# Altium PCB Relay_PCB.PcbDoc
Units mm, origin at the board's own origin, x right, y up, seen from the top; angles counter-clockwise.
Board outline 323.3 x 125.2 mm, 2 copper layers (Top Layer, Bottom Layer); 156 components, 115 nets, 464 pads, 18 vias.
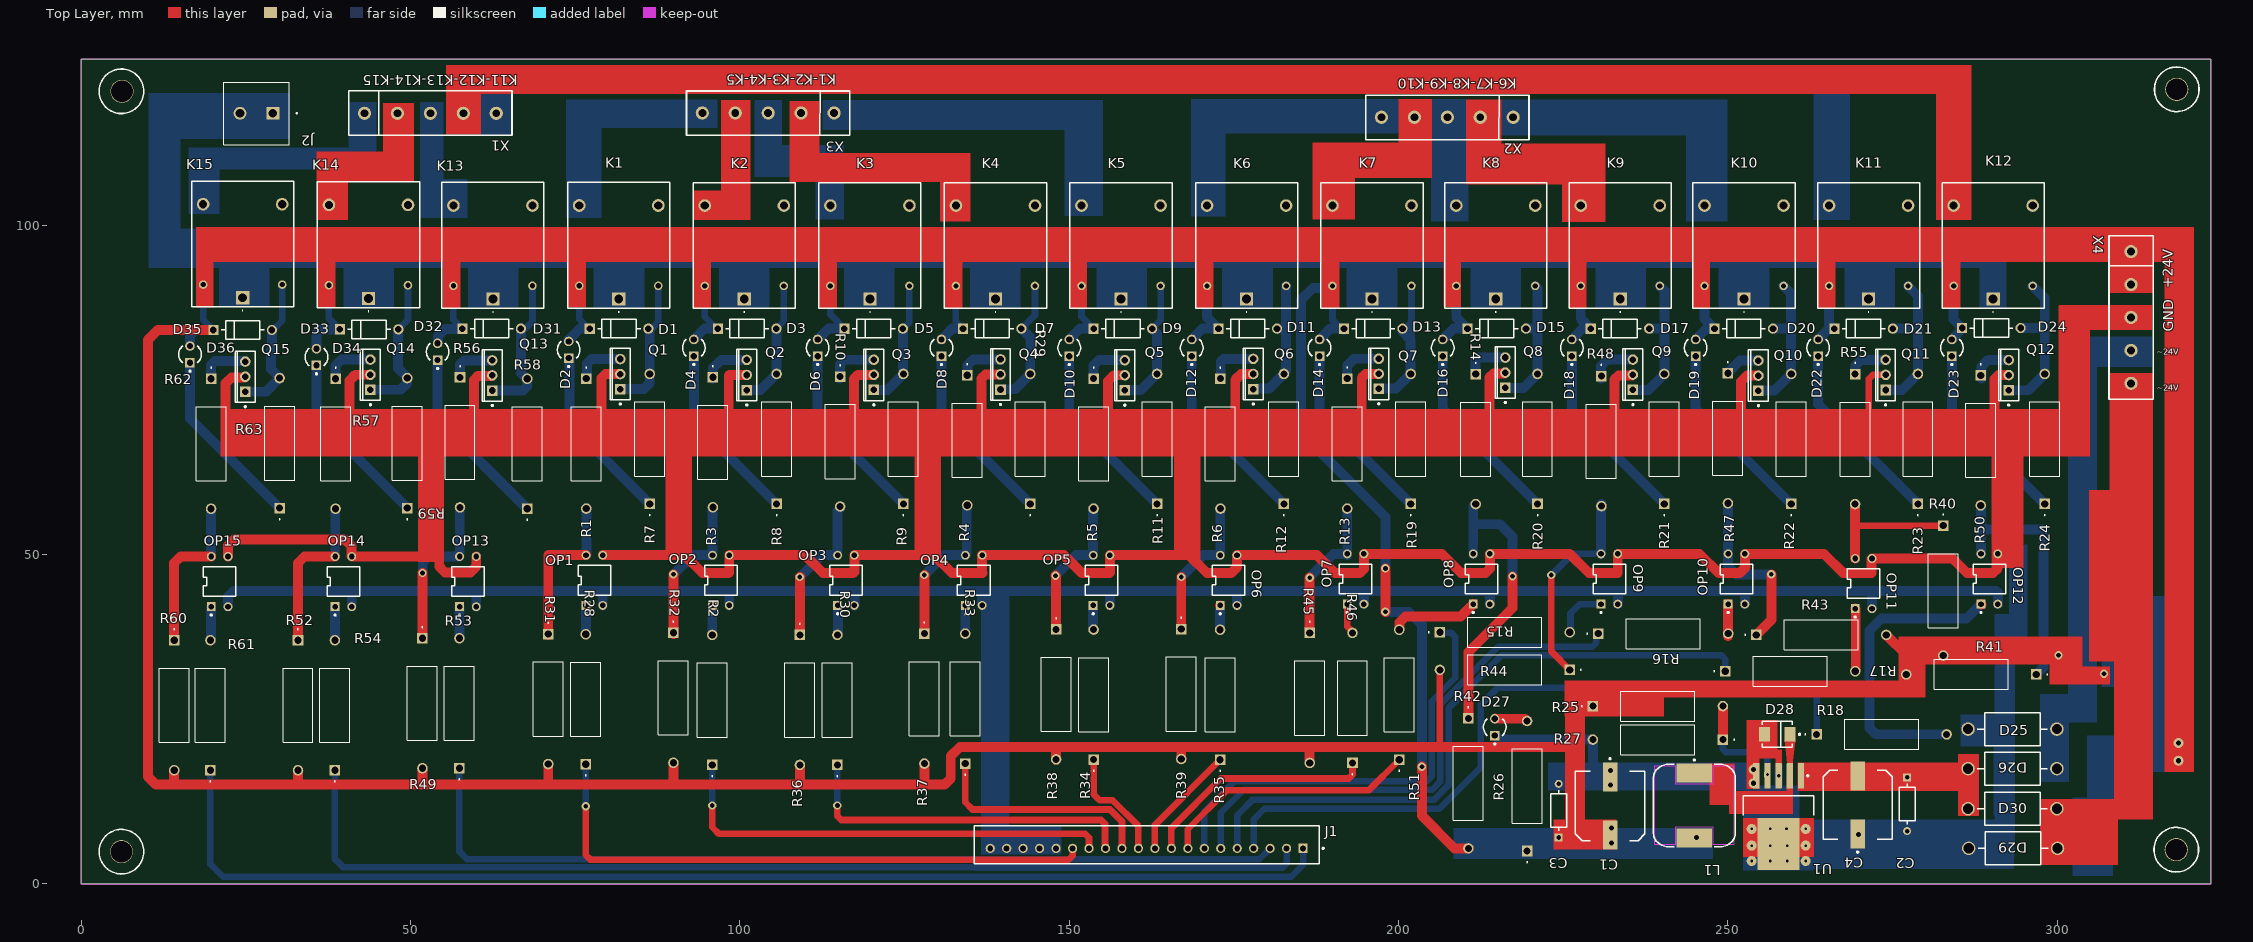
[diagram p0: Top Layer view]
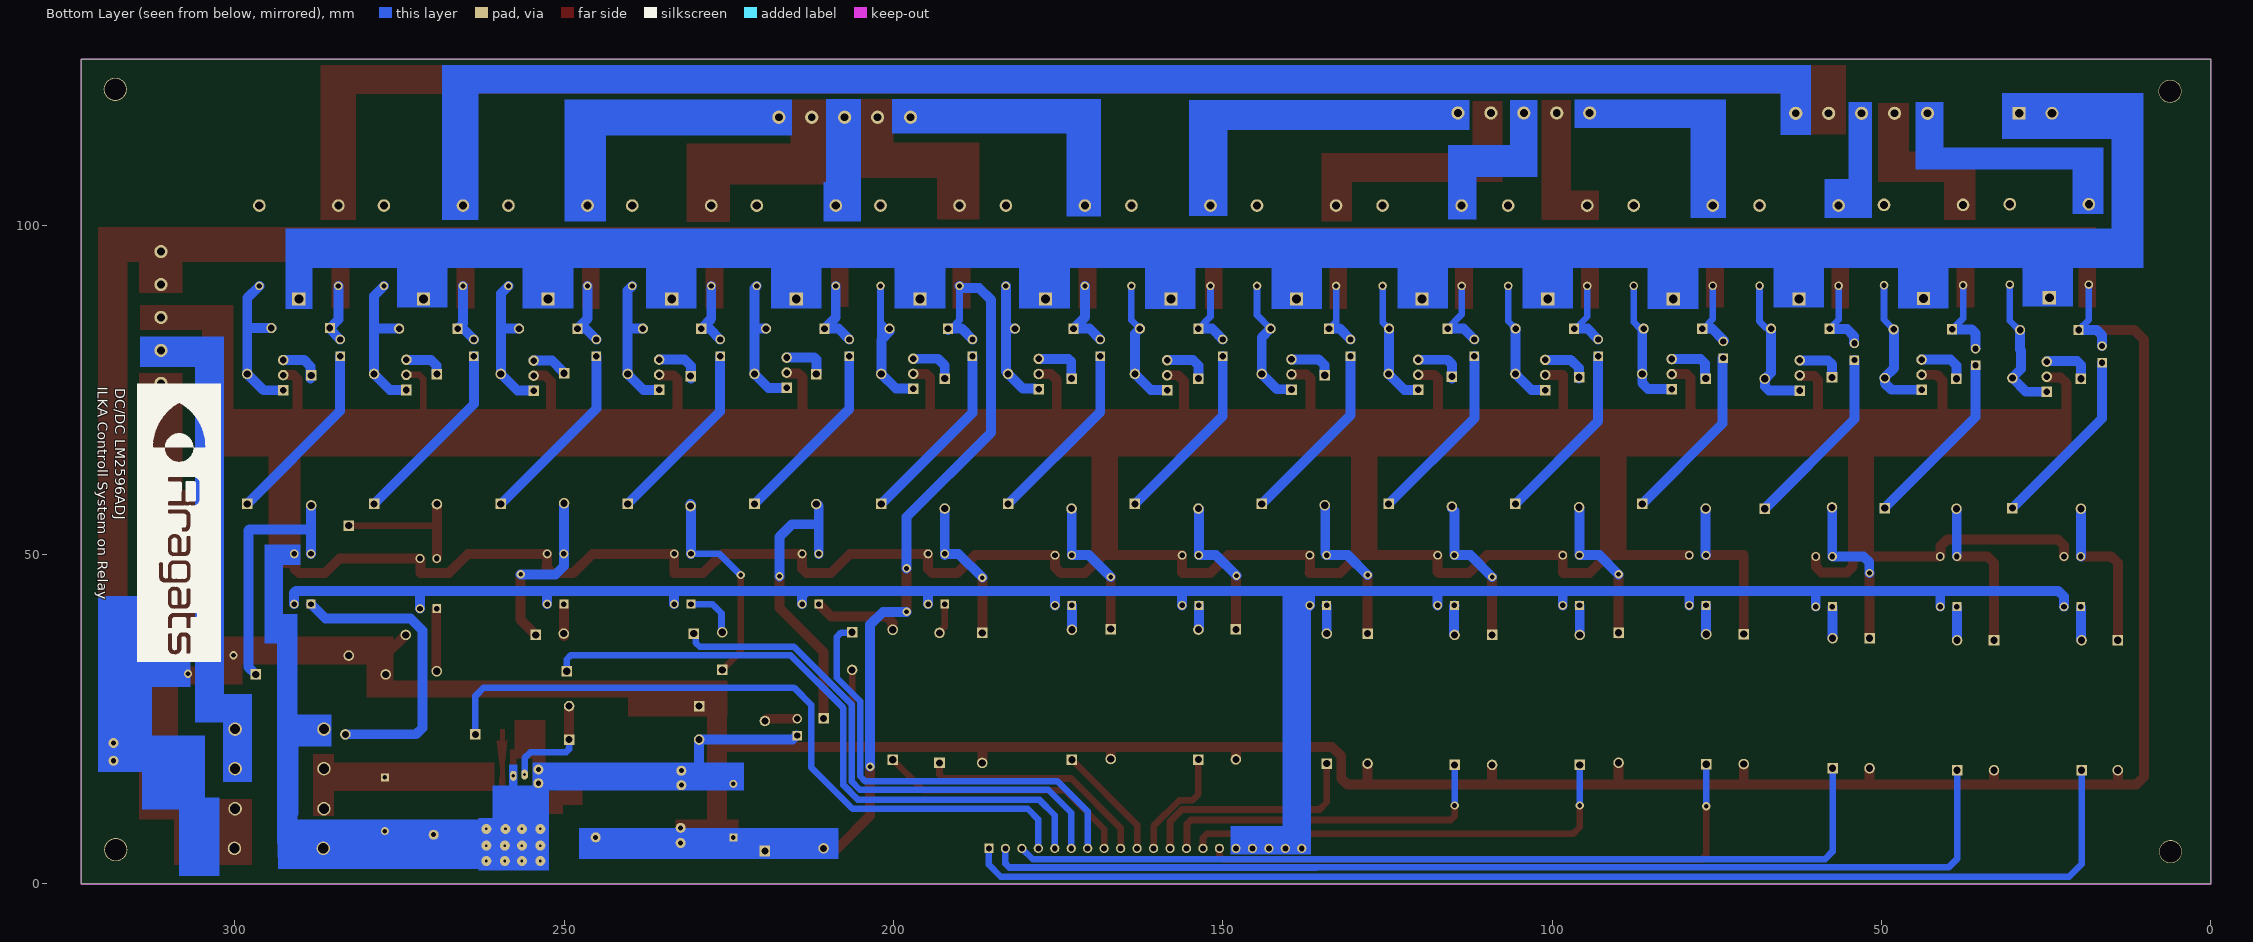
[diagram p1: Bottom Layer view, seen from below]
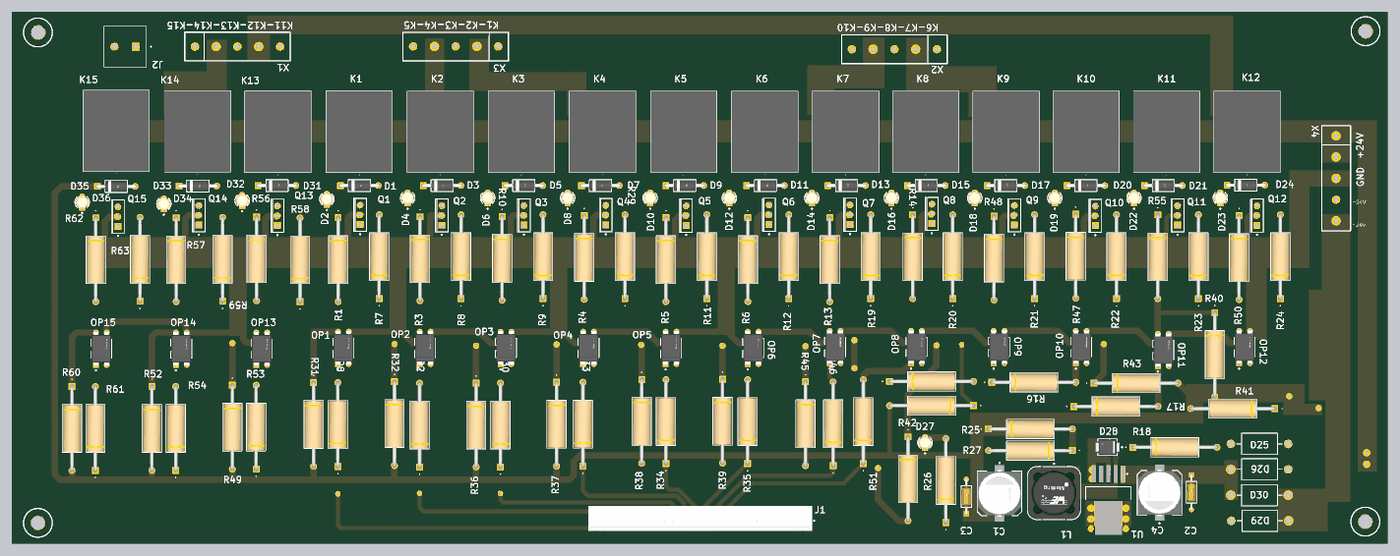
[diagram p2: 3D render of the assembled board from above, using the file's embedded part models]

## Layer stack, top to bottom
Top Solder: solder mask 0.0102, Solder Resist, Dk 3.5
Top Layer: signal copper 0.0356
Dielectric 1: dielectric 0.32, FR-4, Dk 4.8
Bottom Layer: signal copper 0.0356
Bottom Solder: solder mask 0.0102, Solder Resist, Dk 3.5

## Board outline
0,0 0,125.2 323.3,125.2 323.3,0

## Design rules (kind name [scope] priority, off if disabled: settings)
Clearance [All] p1: gap=0.254 ignorepadtopadclearanceinfootprint=FALSE except(0: Arc-Hole Track-Hole SMDPad-Hole THPad-Hole Via-Hole Fill-Hole Poly-Hole Region-Hole Text-Hole)
PolygonConnect [All] p1: connectstyle=Relief reliefconductorwidth=0.254 reliefentries=4 polygonreliefangle="90 Angle" airgapwidth=0.254
RoutingVias [All] p1: holewidth=0.711 width=1.27 viastyle="Through Hole" minholewidth=0.711 minwidth=1.27 maxholewidth=0.711 maxwidth=1.27
SolderMaskExpansion [All] p1: expansion=0.102 istentingtop=FALSE
Width [All] p1: maxlimit=1.5 minlimit=0.254 preferedwidth=1
30 further rules are at their usual default settings.

## Components (designator, comment, footprint, x,y, rotation, side; value= is the part's Value field where it differs from the comment)
C1 "A781MS107M1JLAS030" FP-A781MS-S-MFG 232.1,11.841 r270 top
C2 "C410C104M5U5TA7200" FP-C410C104M5U5TA7200-MFG 277.2,12.1 r270 top
C3 "C410C104M5U5TA7200" FP-C410C104M5U5TA7200-MFG 224.3,11.116 r90 top
C4 "A781MS107M1JLAS030" FP-A781MS-S-MFG 269.7,12 r90 top
D1 "1N4007" FP-1N4007-MFG 81.65,84.3 r0 top value=15pF
D2 "HLMP-1719" FP-HLMP-1719-MFG 74,81.1 r90 top
D3 "1N4007" FP-1N4007-MFG 101.09,84.3 r0 top value=15pF
D4 "HLMP-1719" FP-HLMP-1719-MFG 93,81.4 r90 top
D5 "1N4007" FP-1N4007-MFG 120.3,84.3 r0 top value=15pF
D6 "HLMP-1719" FP-HLMP-1719-MFG 111.8,81.4 r90 top
D7 "1N4007" FP-1N4007-MFG 138.3,84.3 r0 top value=15pF
D8 "HLMP-1719" FP-HLMP-1719-MFG 130.6,81.4 r90 top
D9 "1N4007" FP-1N4007-MFG 158.14,84.3 r0 top value=15pF
D10 "HLMP-1719" FP-HLMP-1719-MFG 150,81.4 r90 top
D11 "1N4007" FP-1N4007-MFG 177.1,84.3 r0 top value=15pF
D12 "HLMP-1719" FP-HLMP-1719-MFG 168.6,81.4 r90 top
D13 "1N4007" FP-1N4007-MFG 196.15,84.3 r0 top value=15pF
D14 "HLMP-1719" FP-HLMP-1719-MFG 188,81.4 r90 top
D15 "1N4007" FP-1N4007-MFG 214.9,84.3 r0 top value=15pF
D16 "HLMP-1719" FP-HLMP-1719-MFG 206.7,81.4 r90 top
D17 "1N4007" FP-1N4007-MFG 233.6,84.3 r0 top value=15pF
D18 "HLMP-1719" FP-HLMP-1719-MFG 226.3,81.4 r90 top
D19 "1N4007" FP-1N4007-MFG 252.4,84.3 r0 top value=15pF
D20 "HLMP-1719" FP-HLMP-1719-MFG 245.1,81.4 r90 top
D21 "1N4007" FP-1N4007-MFG 270.6,84.3 r0 top value=15pF
D22 "HLMP-1719" FP-HLMP-1719-MFG 263.7,81.4 r90 top
D23 "1N4007" FP-1N4007-MFG 290,84.4 r0 top value=15pF
D24 "HLMP-1719" FP-HLMP-1719-MFG 284,81.4 r90 top
D25 "1N5408" ONSC-AXIAL_LEAD-2-267-05_V 293.2,23.5 r180 top
D26 "1N5408" ONSC-AXIAL_LEAD-2-267-05_V 293.2,17.5 r180 top
D27 "HLMP-1719" FP-HLMP-1719-MFG 214.6,23.8 r90 top
D28 "SS24-E3/5BT" FP-95401-MFG 257.5,22.716 r180 top
D29 "1N5408" ONSC-AXIAL_LEAD-2-267-05_V 293.3,5.4 r0 top
D30 "1N5408" ONSC-AXIAL_LEAD-2-267-05_V 293.2,11.416 r0 top
D31 "1N4007" FP-1N4007-MFG 62.3,84.3 r0 top value=15pF
D32 "HLMP-1719" FP-HLMP-1719-MFG 54.1,80.8 r90 top
D33 "1N4007" FP-1N4007-MFG 43.7,84.2 r0 top value=15pF
D34 "HLMP-1719" FP-HLMP-1719-MFG 35.7,80 r90 top
D35 "1N4007" FP-1N4007-MFG 24.5,84.1 r0 top value=15pF
D36 "HLMP-1719" FP-HLMP-1719-MFG 16.5,80.4 r90 top
J1 "B20B-XH-A(LF)(SN)" FP-B20B-XH-A_LF_SN-MFG 161.75,5.925 r0 top
J2 "1890963" PHOENIX_1890963 31.6,121.75 r180 top
K1 "SRD-DC24V-SL-A" srd24vdcslc 81.6,88.8 r90 top
K2 "SRD-DC24V-SL-A" srd24vdcslc 100.665,88.786 r90 top
K3 "SRD-DC24V-SL-A" srd24vdcslc 119.73,88.786 r90 top
K4 "SRD-DC24V-SL-A" srd24vdcslc 138.795,88.786 r90 top
K5 "SRD-DC24V-SL-A" srd24vdcslc 157.86,88.786 r90 top
K6 "SRD-DC24V-SL-A" srd24vdcslc 176.925,88.786 r90 top
K7 "SRD-DC24V-SL-A" srd24vdcslc 195.959,88.786 r90 top
K8 "SRD-DC24V-SL-A" srd24vdcslc 214.745,88.786 r90 top
K9 "SRD-DC24V-SL-A" srd24vdcslc 233.658,88.786 r90 top
K10 "SRD-DC24V-SL-A" srd24vdcslc 252.444,88.786 r90 top
K11 "SRD-DC24V-SL-A" srd24vdcslc 271.357,88.786 r90 top
K12 "SRD-DC24V-SL-A" srd24vdcslc 290.27,88.786 r90 top
K13 "SRD-DC24V-SL-A" srd24vdcslc 62.5,88.8 r90 top
K14 "SRD-DC24V-SL-A" srd24vdcslc 43.6,88.9 r90 top
K15 "SRD-DC24V-SL-A" srd24vdcslc 24.5,89 r90 top
L1 "74477020" WE-PD_1280 244.9,11.916 r180 top
OP1 "PS2501-1-A" FP-PS2501-1-A-MFG 77.9,46.1 r90 top
OP2 "PS2501-1-A" FP-PS2501-1-A-MFG 97.1,46.1 r90 top
OP3 "PS2501-1-A" FP-PS2501-1-A-MFG 116.1,46.1 r90 top
OP4 "PS2501-1-A" FP-PS2501-1-A-MFG 135.5,46.1 r90 top
OP5 "PS2501-1-A" FP-PS2501-1-A-MFG 154.9,46.1 r90 top
OP6 "PS2501-1-A" FP-PS2501-1-A-MFG 174.2,46.1 r90 top
OP7 "PS2501-1-A" FP-PS2501-1-A-MFG 193.47,46.3 r90 top
OP8 "PS2501-1-A" FP-PS2501-1-A-MFG 212.6,46.3 r90 top
OP9 "PS2501-1-A" FP-PS2501-1-A-MFG 232,46.3 r90 top
OP10 "PS2501-1-A" FP-PS2501-1-A-MFG 251.3,46.3 r90 top
OP11 "PS2501-1-A" FP-PS2501-1-A-MFG 270.6,45.6 r90 top
OP12 "PS2501-1-A" FP-PS2501-1-A-MFG 289.7,46.3 r90 top
OP13 "PS2501-1-A" FP-PS2501-1-A-MFG 58.7,45.9 r90 top
OP14 "PS2501-1-A" FP-PS2501-1-A-MFG 39.8,45.9 r90 top
OP15 "PS2501-1-A" FP-PS2501-1-A-MFG 21,45.9 r90 top
Q1 "BD140G" ONSC-TO-225-3-77-09 81.84,77.4 r180 top
Q2 "BD140G" ONSC-TO-225-3-77-09 101.04,77.27 r180 top
Q3 "BD140G" ONSC-TO-225-3-77-09 120.33,77.29 r180 top
Q4 "BD140G" ONSC-TO-225-3-77-09 139.56,77.35 r180 top
Q5 "BD140G" ONSC-TO-225-3-77-09 158.44,77.23 r180 top
Q6 "BD140G" ONSC-TO-225-3-77-09 177.94,77.42 r180 top
Q7 "BD140G" ONSC-TO-225-3-77-09 196.98,77.44 r180 top
Q8 "BD140G" ONSC-TO-225-3-77-09 216.21,77.63 r180 top
Q9 "BD140G" ONSC-TO-225-3-77-09 235.58,77.32 r180 top
Q10 "BD140G" ONSC-TO-225-3-77-09 254.63,77.17 r180 top
Q11 "BD140G" ONSC-TO-225-3-77-09 273.94,77.28 r180 top
Q12 "BD140G" ONSC-TO-225-3-77-09 292.63,77.25 r180 top
Q13 "BD140G" ONSC-TO-225-3-77-09 62.4,77.2 r180 top
Q14 "BD140G" ONSC-TO-225-3-77-09 43.9,77.31 r180 top
Q15 "BD140G" ONSC-TO-225-3-77-09 24.9,77.01 r180 top
R1 "1k" RES_AC01_VIS 76.68,76.715 r270 top
R2 "1k" RES_AC01_VIS 95.8,18.064 r90 top
R3 "1k" RES_AC01_VIS 95.9,76.936 r270 top
R4 "1k" RES_AC01_VIS 134.5,77.236 r270 top
R5 "1k" RES_AC01_VIS 153.699,76.715 r270 top
R6 "1k" RES_AC01_VIS 172.954,76.715 r270 top
R7 "1k" RES_AC01_VIS 86.307,57.69 r90 top
R8 "1k" RES_AC01_VIS 105.562,57.69 r90 top
R9 "1k" RES_AC01_VIS 124.817,57.69 r90 top
R10 "1k" RES_AC01_VIS 115.2,77.036 r270 top
R11 "1k" RES_AC01_VIS 163.327,57.69 r90 top
R12 "1k" RES_AC01_VIS 182.581,57.69 r90 top
R13 "1k" RES_AC01_VIS 192.209,76.715 r270 top
R14 "1k" RES_AC01_VIS 211.7,77.4 r270 top
R15 "1k" RES_AC01_VIS 206.264,38.2 r0 top
R16 "1k" RES_AC01_VIS 230.3,38 r0 top
R17 "1k" RES_AC01_VIS 249.6,32.3 r0 top
R18 "1k" RES_AC01_VIS 263.464,22.7 r0 top
R19 "1k" RES_AC01_VIS 201.836,57.69 r90 top
R20 "1k" RES_AC01_VIS 221.091,57.69 r90 top
R21 "1k" RES_AC01_VIS 240.346,57.69 r90 top
R22 "1k" RES_AC01_VIS 259.6,57.69 r90 top
R23 "1k" RES_AC01_VIS 278.855,57.69 r90 top
R24 "1k" RES_AC01_VIS 298.11,57.69 r90 top
R25 "AC01000001001JA100" RES_AC01_VIS 229.5,27 r0 top
R26 "AC01000001001JA100" RES_AC01_VIS 219.5,5 r90 top
R27 "AC01000001001JA100" RES_AC01_VIS 249.236,21.916 r180 top
R28 "1k" RES_AC01_VIS 76.6,18.164 r90 top
R29 "1k" RES_AC01_VIS 144.072,57.69 r90 top
R30 "1k" RES_AC01_VIS 114.8,18.064 r90 top
R31 "100K" RES_AC01_VIS 70.9,37.936 r270 top
R32 "100K" RES_AC01_VIS 89.9,38.136 r270 top
R33 "1k" RES_AC01_VIS 134.2,18.264 r90 top
R34 "1k" RES_AC01_VIS 153.7,18.875 r90 top
R35 "1k" RES_AC01_VIS 172.9,18.864 r90 top
R36 "100K" RES_AC01_VIS 109.1,37.8 r270 top
R37 "100K" RES_AC01_VIS 128,38 r270 top
R38 "100K" RES_AC01_VIS 148,38.636 r270 top
R39 "100K" RES_AC01_VIS 167,38.7 r270 top
R40 "100K" RES_AC01_VIS 282.7,54.4 r270 top
R41 "100K" RES_AC01_VIS 296.8,31.8 r180 top
R42 "100K" RES_AC01_VIS 210.6,25.136 r270 top
R43 "100K" RES_AC01_VIS 254.3,37.8 r0 top
R44 "100K" RES_AC01_VIS 226,32.5 r180 top
R45 "100K" RES_AC01_VIS 186.5,38.1 r270 top
R46 "1k" RES_AC01_VIS 193,18.364 r90 top
R47 "1k" RES_AC01_VIS 250,77.536 r270 top
R48 "1k" RES_AC01_VIS 230.8,77.1 r270 top
R49 "100K" RES_AC01_VIS 51.8,37.3 r270 top
R50 "1k" RES_AC01_VIS 288.4,77.2 r270 top
R51 "1k" RES_AC01_VIS 200.1,18.864 r90 top
R52 "100K" RES_AC01_VIS 32.9,37 r270 top
R53 "1k" RES_AC01_VIS 57.4,17.564 r90 top
R54 "1k" RES_AC01_VIS 38.5,17.264 r90 top
R55 "1k" RES_AC01_VIS 269.3,77.4 r270 top
R56 "1k" RES_AC01_VIS 57.5,76.9 r270 top
R57 "1k" RES_AC01_VIS 38.6,76.7 r270 top
R58 "1k" RES_AC01_VIS 67.7,56.964 r90 top
R59 "1k" RES_AC01_VIS 49.5,57.064 r90 top
R60 "100K" RES_AC01_VIS 14.1,37 r270 top
R61 "1k" RES_AC01_VIS 19.6,17.264 r90 top
R62 "1k" RES_AC01_VIS 19.7,76.7 r270 top
R63 "1k" RES_AC01_VIS 30.1,57.064 r90 top
U1 "LM2596SX-ADJ/NOPB" KTT0005B_L 257.7,10.216 r270 top
X1 "571-3-282836-3" PCBComponent_1 40.686,113.648 r0 top
X2 "571-3-282836-3" PCBComponent_1 219.714,119.752 r180 top
X3 "571-3-282836-3" PCBComponent_1 116.6,120.4 r180 top
X4 "571-3-282836-3" PCBComponent_1 307.848,98.314 r270 top

## Footprints (in the part's own frame and the unit in brackets; to place one, negate y for a bottom-side part, rotate by r counter-clockwise, add the part's x,y. Pads: shape width x height; smd on the part's side, far side on the other; paste and mask are expansions set on the pad)
FP-1N4007-MFG [mm]
  rect 1.55x1.55 hole 1 paste-2539.97 mask+0: 1(-4.44,0)
  round 1.55 hole 1 paste-2539.97 mask+0: 2(4.44,0)
  silkscreen extent -3.26,-1.4 3.26,1.4, body extent -5.32,-1.5 5.32,1.5, height 0.25
FP-95401-MFG [mm]
  rect 1.716x2.18 smd paste+0 mask+0: 1(-1.937,0) 2(1.937,0)
  silkscreen extent -3.5,-1.97 2.28,1.97, body extent -2.9,-2.07 2.89,2.07, height 0.25
FP-A781MS-S-MFG [mm]
  rect 4.4x2.2 smd paste+0 mask+0: 1(-4.4,0) 2(4.4,0)
  silkscreen extent -7.3,-5.25 5.25,5.25, body extent -6.85,-5.5 6.85,5.5, height 0.25
FP-B20B-XH-A_LF_SN-MFG [mm]
  rect 1.4x1.4 hole 0.9 paste-2539.97 mask+0: 1(23.75,-0.525)
  round 1.4 hole 0.9 paste-2539.97 mask+0: 2(21.25,-0.525) 3(18.75,-0.525) 4(16.25,-0.525) 5(13.75,-0.525) 6(11.25,-0.525) 7(8.75,-0.525) 8(6.25,-0.525) 9(3.75,-0.525) 10(1.25,-0.525) 11(-1.25,-0.525) 12(-3.75,-0.525) 13(-6.25,-0.525) 14(-8.75,-0.525) 15(-11.25,-0.525) 16(-13.75,-0.525) 17(-16.25,-0.525) 18(-18.75,-0.525) 19(-21.25,-0.525) 20(-23.75,-0.525)
  silkscreen extent -26.2,-2.88 26.93,2.88, body extent -26.3,-2.98 26.3,2.98, height 0.25
FP-C410C104M5U5TA7200-MFG [mm]
  rect 1.2x1.2 hole 0.7 paste-2539.97 mask+0: 1(-4.075,0)
  round 1.2 hole 0.7 paste-2539.97 mask+0: 2(4.075,0)
  silkscreen extent -3.08,-1.2 3.08,1.2, body extent -4.77,-1.31 4.77,1.31, height 0.25
FP-HLMP-1719-MFG [mm]
  rect 1.45x1.45 hole 0.95 paste-2539.97 mask+0: 1(-1.27,0)
  round 1.45 hole 0.95 paste-2539.97 mask+0: 2(1.27,0)
  silkscreen extent -2.67,-1.71 1.3,1.71, body extent -2.22,-2.22 2.22,2.22, height 0.25
FP-PS2501-1-A-MFG [mm]
  rect 1.35x1.35 hole 0.85 paste-2539.97 mask+0: 1(-3.81,1.27)
  round 1.35 hole 0.85 paste-2539.97 mask+0: 2(-3.81,-1.27) 3(3.81,-1.27) 4(3.81,1.27)
  silkscreen extent -5.21,-2.47 2.25,2.47, body extent -4.58,-2.58 4.58,2.58, height 0.25
KTT0005B_L [mm] "DPAK, 5-Leads, Body 10.65x9.65mm, Pitch 1.7mm, IPC High Density"
  rrect11% 3.85x0.95 smd: 1(-6.2,3.4) 2(-6.2,1.7) 3(-6.2,0) 4(-6.2,-1.7) 5(-6.2,-3.4)
  rrect2% 7.9x6.4 smd: 6(4.15,0)
  silkscreen extent -6.32,-5.35 -0.2,5.35, body extent -3.2,-5.32 6.45,5.33, height 4.83
ONSC-AXIAL_LEAD-2-267-05_V [mm] "AXIAL, 2-Leads, Diameter 5.05mm"
  round 2.05 hole 1.55: 1(-6.745,0) 2(6.745,0)
  silkscreen extent -5.32,-2.52 5.32,2.52
ONSC-TO-225-3-77-09 [mm] "FM, 3-Leads, Body 7.8x3mm, Pitch 2.29mm"
  rect 1.6x1.6 hole 1: 1(0,2.29)
  round 1.6 hole 1: 2(0,0) 3(0,-2.29)
  silkscreen extent -1.49,-3.9 1.51,4.67, body extent -1.49,-3.9 1.51,3.9, height 13.64
PCBComponent_1 [mm]
  round 2 hole 1.2: 1(2.314,3.352) 2(7.314,3.352) 3(12.314,3.352) 4(17.314,3.352) 5(22.314,3.352)
  silkscreen extent -0.09,0.02 24.71,6.75
PHOENIX_1890963 [mm]
  rect 1.95x1.95 / inner round 1.95 / far side rect 1.95x1.95 hole 1.3: 1(2.5,4.75)
  round 1.95 hole 1.3: 2(7.5,4.75)
  silkscreen extent -1.2,0 10,9.5
RES_AC01_VIS [mil]
  rect 63x63 / inner round 60 / far side rect 63x63 hole 43 paste-99999 mask+0: 1(0,0)
  round 63 / inner round 60 / far side round 63 hole 43 paste-99999 mask+0: 2(777,0)
  silkscreen extent -69,-89 610,90, body extent -16,-84 794,84, height 169
srd24vdcslc [mm]
  rect 2.01x2.01 hole 1.34: 1(0,0)
  round 1.3 hole 0.8: 2(2,-6) 5(2,6)
  round 1.92 hole 1.24: 3(14.2,-6) 4(14.2,6)
  silkscreen extent -2,-7.75 17.7,7.75, body extent -1.4,-7.75 17.7,7.75, height 15.4
WE-PD_1280 [mm] "SMT Shielded Power Inductor, 2-leads, body 12x12mm"
  rect 5.4x2.9 smd: 1(0,-4.95) 2(0,4.95)
  Top Layer keep-out region: -6,6 -2.9,6 -2.9,3.3 2.9,3.3 2.9,6 6,6 6,-6 2.9,-6 2.9,-3.3 -2.9,-3.3 -2.9,-6 -6,-6
  silkscreen extent -6.25,-7.02 6.25,6.25, body extent -6,-6 6,6, height 7.51

## Part data
C1 C4: library part CMP-03016-000042-1, "HYBRID POLYMER, V-CHIP, AEC-Q200"
C2 C3: library part CMP-03020-034640-1, "CAP CER 0.1UF 50V Z5U AXIAL", Capacitance=100nF, Case/Package=Axial, Dielectric=Z5U, Max Operating Temperature=85°C, Min Operating Temperature=10°C, Package Quantity=5000, Tolerance=20%, Voltage Rating=50V, Construction=AXIAL, Dissipation Factor=4%, Lead Diameter=0.51mm, Lead Free="Lead Free", Lead Length=25.4mm, Length=4.32mm, Mount="Through Hole", Number of Pins=2, Packaging="Tape and Reel", Radiation Hardening=No, REACH SVHC="No SVHC", RoHS Compliant=Yes, Series="Aximax 400", Termination=Axial, Voltage Rating (DC)=50V
D1 D3 D5 D7 D9 D11 D13 D15 D17 D19 D21 D23 D31 D33 D35: library part CMP-123542-000001-1, "Rectifier diode 1000 V 1 A DO-41, ,", Capacitance=15pF, Forward Current=1A, Manufacturer=Diotec, Max Junction Temp=+175°C, Max Repetitive Reverse Voltage=1000V, Max Surge Forward Current=27A, Peak Reverse Current=5uA, Temperature="-50°C to +175°C", Temperature Range Low=-50°C, Automotive=No, Category=Diode, ComponentLink2Description=Datasheet, ComponentLink2URL=https://datasheet.octopart.com/1N4007-Diotec-datasheet-62346875.pdf, Device Class L1="Discrete Semiconductors", Device Class L2=Diodes, Device Class L3="Rectifier Diodes", Height=2.8mm, Ipc Land Pattern Name=DIOAD888W100L520D280, Lead Free=Yes, Manufacturer Part Number=1N4007, Octopart=https://octopart.com/1n4007-diotec-4040411, Package=1N4007, Reverse Voltage=1000V, RoHS=TRUE, Temperature Range High=+175°C
D2 D4 D6 D8 D10 D12 D14 D16 D18 D20 D22 D24 D27 D32 D34 D36: library part CMP-2000-06410-2, "LED YELLOW DIFFUSED T-1 T/H", Colour=Yellow, Forward Current=2mA, Forward Voltage=1.8V, Manufacturer=Broadcom, Package=0, Power Dissipation=17.5mW, Reverse Voltage=5V, Temperature="-40°C to +100°C", Temperature Range High=+100°C, Temperature Range Low=-40°C, Automotive=No, Category=Diode, ComponentLink2Description=Datasheet, ComponentLink2URL=https://docs.broadcom.com/docs/AV02-1557EN, Device Class L1=Optoelectronics, Device Class L2=LEDs, Device Class L3=unset, Digikey Description="LED YELLOW DIFFUSED T-1 T/H", Lead Free=Yes, Led Orientation=Straight, Luminous Intensity=2.1mcd, Manufacturer Part Number=HLMP-1719, Mouser Description="Standard LEDs - Through Hole Yellow Diffused 585nm 2.1mcd", Octopart=https://octopart.com/hlmp-1719-broadcom-71130405, RoHS=TRUE, Viewing Angle=50°, Wavelength=585nm
D25 D26 D29 D30: library part CMP-0902-00037-1, "Standard Recovery Rectifier, 2-Pin Axial_Lead, Pb-Free, Bulk Box", Manufacturer="On Semiconductor", ComponentLink1Description="Manufacturer URL", ComponentLink1URL=http://www.onsemi.com/, ComponentLink2Description=Datasheet, ComponentLink2URL=http://www.onsemi.com/pub_link/Collateral/1N5400-D.PDF, ComponentLink3Description="Package Specification", ComponentLink3URL=http://www.onsemi.com/pub_link/Collateral/267-05.PDF, DatasheetVersion="Rev. 10", IFSM Max (A)=200, IO(rec) Max (A)=3, Mounting Technology="Through Hole", PackageDescription="2-Pin, Axial Lead, Diameter 5.05 mm", PackageReference=AXIAL_LEAD-2-267-05, PackageVersion="Rev. G, 06/2000", Packing="Bulk Box", PartNumber=1N5408, RoHS=TRUE, Type="Standard Recovery", VRRM Max (V)=1000
D28: library part CMP-00030-42277690-1, "SS24-E3/5BT Rectifier Diode, Schottky, 1 Phase, 1 Element, 2A, 40V V(RRM), Silicon, DO-214AA", Average Rectified Current=2A, Case/Package=SMB, Forward Voltage=500mV, Max Forward Surge Current (Ifsm)=75A, Max Operating Temperature=125°C, Max Repetitive Reverse Voltage (Vrrm)=40V, Max Reverse Leakage Current=400µA, Min Operating Temperature=-65°C, Contact Plating=Tin, Element Configuration=Single, Forward Current=2A, Lead Free="Lead Free", Length=4.7mm, Max Reverse Voltage (DC)=40V, Max Surge Current=75A, Mount="Surface Mount", NexarPartId=42277690, Number of Pins=2, Peak Non-Repetitive Surge Current=75A, Peak Reverse Current=400µA, Radiation Hardening=No, RoHS=Compliant, Width=3.8mm
J1: library part CMP-17439-000690-1, "CONN HEADER VERT 20POS 2.5MM", Color=Natural, Connector Type="Male Pin", Contact Plating=Tin, Contact Type="Male Pin", Fastening Type=Detent, Lead Free="Lead Free", Mount="Through Hole", Number of Positions=20, Number of Rows=1, Packaging=Bulk, Pitch=0.098inch, Series=XH, Termination=Press-Fit
J2: Package=None, Availability=Unavailable, MP=1890963, Price=None
K1 K2 K3 K4 K5 K6 K7 K8 K9 K10 K11 K12 K13 K14 K15: library part srd-24vdc-sl-c, "Relay or Contactor", Manufacturer_Name=EAGLE, Datasheet Link=https://pdf1.alldatasheet.com/datasheet-pdf/view/1132032/SONGLERELAY/SRD-24VDC-SL-C.html, Height=15.3mm, Manufacturer_Part_Number=srd-24vdc-sl-c
L1: library part CMP-0227-00167-2, Ambient Temperature Range High=85°C, Ambient Temperature Range Low=-40°C, Case/Package=Nonstandard, Current Rating=2.2A, DC Resistance (DCR)=117mΩ, Inductance=100µH, Inductance Tolerance=20%, Max Operating Temperature=125°C, Resistance=220mΩ, Saturation Current=2.4A, Self Resonant Frequency=5.2MHz, Test Frequency=1kHz, Composition=Wirewound, Core Material=Ferrite, Depth=12mm, Height=8mm, Height - Seated (Max)=8.001mm, Lead Pitch=7mm, Length=12mm, Max DC Current=2.2A, Min Operating Temperature=-40°C, Mount="Surface Mount", NexarPartId=8917151, Number of Pins=2, Packaging="Tape & Reel (TR)", REACH SVHC=Unknown, RMS Current (Irms)=2.2A, RoHS=Compliant, Series Resistance=220mΩ, Shielding=Shielded, Termination=SMD/SMT, Tolerance=20%, Weight=18.143695g, Width=12mm
OP1 OP2 OP3 OP4 OP5 OP6 OP7 OP8 OP9 OP10 OP11 OP12 OP13 OP14 OP15: library part CMP-13576-000004-1, "OPTOISOLATOR 5KV TRANS 4DIP", Case/Package=PDIP, Collector Emitter Saturation Voltage=300mV, Collector Emitter Voltage (VCEO)=80V, Current Transfer Ratio=600%, Forward Current=80mA, Forward Voltage=1.4V, Isolation Voltage=5kV, Max Operating Temperature=100°C, Min Operating Temperature=-55°C, Reverse Breakdown Voltage=6V, Input Type=DC, Mount="Through Hole", Number of Elements=1, Number of Pins=4, Radiation Hardening=No, RoHS Compliant=Yes
Q1 Q2 Q3 Q4 Q5 Q6 Q7 Q8 Q9 Q10 Q11 Q12 Q13 Q14 Q15: library part CMP-1048-01270-1, "Plastic Medium-Power Silicon PNP Transistor, 3-Pin TO-225, Pb-Free, Bulk Box", Manufacturer="ON Semiconductor", ComponentLink1Description="Manufacturer URL", ComponentLink1URL=http://www.onsemi.com/, ComponentLink2Description=Datasheet, ComponentLink2URL=http://www.onsemi.com/pub_link/Collateral/BD136-D.PDF, ComponentLink3Description="Package Specification", ComponentLink3URL=http://www.onsemi.com/pub_link/Collateral/77-09.PDF, DatasheetVersion="Rev. 15", IC Continuous (A)=1.5, Manufacturer Part Number=BD140G, Mounting Technology="Through Hole", PackageDescription="3-Pin Flange Mount, Vertical Straight Lead, Body 7.6 x 2.7 mm, Pitch 2.29 mm", PackageReference=TO-225-3-77-09, PackageVersion="Rev. AC, 12/2013", Packing="Bulk Box", PartNumber=BD140G, Polarity=PNP, RoHS=TRUE
R1 R2 R3 R4 R5 R6 R7 R8 R9 R10 R11 R12 R13 R14 R15 R16 R17 R18 R19 R20 R21 R22 R23 R24 R25 R26 R27 R28 R29 R30 R31 R32 R33 R34 R35 R36 R37 R38 R39 R40 R41 R42 R43 R44 R45 R46 R47 R48 R49 R50 R51 R52 R53 R54 R55 R56 R57 R58 R59 R60 R61 R62 R63: library part CMP-T1-00030-42521882-4, "VISHAY AC01000001001JA100 Through Hole Resistor, 1 kohm, Axial Leaded, 1 W, 5%, AC Series", Case/Package=Axial, Max Operating Temperature=275°C, Max Power Dissipation=1W, Min Operating Temperature=-40°C, Resistance=1kΩ, Temperature Coefficient=180ppm/°C, Tolerance=5%, Voltage Rating (DC)=32V, Composition=Wirewound, Contact Plating=Tin, Diameter=4.3mm, Features="Flame Retardant Coating", Lead Diameter=800µm, Lead Free="Lead Free", Length=11mm, Military Standard=Not, NexarPartId=42521882, Number of Pins=2, Number of Terminations=2, Packaging="Tape & Box (TB)", Power Rating=1W, Radiation Hardening=No, REACH SVHC=Unknown, RoHS=Compliant, Schedule B="8533210080, 8533210080", Termination=Axial
U1: library part CMP-2000-06545-1, "Simple Switcher(R) Power Converter 150 kHz Step-Down Voltage Regulator, 3 A, 4.5 to 40 V, -40 to 125 degC, 5-Pin TO-263 (KTT), Green (RoHS & no Sb/Br), Tape and Reel", Manufacturer="Texas Instruments", Operating Temperature Max=125°C, Operating Temperature Min=-40°C, Operating Temperature Range=-40°Cto+125°C, Output Current=3A, Output Voltage=37V, Package Description="5-Pin Plastic Flange Mount, Body 10.16 x 8.925 mm, Pitch 1.7 mm", Package Reference=KTT5, Package Version="4200577-4/G, 01/2013", PartNumber=LM2596, Primary Input Voltage=40V, Voltage Regulator Case Style=TO-263, Datasheet URL=http://www.ti.com/lit/ds/symlink/lm2596.pdf, Datasheet Version="Rev. C, 04/2013", Manufacturer URL=http://www.ti.com/, Mounting Technology=SurfaceMount, MSL=MSL3-168hours, No. of Outputs=1, No. of Pins=5, Number of Outputs=1, Package URL=http://www.ti.com/litv/pdf/mpsf007e, SVHC=NoSVHC(19-Dec-2012)
X1 X2 X3 X4: library part Connector

## Free pads (board coordinates)
  round 3.5 hole 3.3 unplated: 38(6.1,4.9) 38(6.17,120.34) 38(318.07,5.2) 38(318.14,120.64)
  oval 1x1.524 hole 0.5: 39(256,16.6) 39(257.7,16.416)
  round 1.524 hole 0.762: 40(253.9,15.284) 41(253.9,17.368) 42(232.2,14.984) 43(232.2,17.184) 44(232.3,6.216) 45(232.3,8.516) 50(245.2,7.066) 52(318.4,21.4) 53(318.4,18.7) 55(269.8,7.468)
  round 1.524 hole 0.4: 46(253.6,8.351) 46(256.4,8.351) 46(258.9,8.351) 46(261.8,8.351) 47(253.6,5.818) 47(256.4,5.818) 47(259,5.818) 47(261.8,5.818) 48(253.6,3.484) 48(256.4,3.484) 48(259,3.484) 48(261.8,3.484)

## Via types
v1: diameter 1.27, hole 0.711, Top Layer to Bottom Layer, 18 vias

## Nets (pads, with @x,y where several pads share a name; then routed paths per layer and width w, separated by ;. In a path a pad name is that pad's centre, name@x,y a point inside that pad or via, vN(x,y) a via of type N, cw(c..) or ccw(c..) an arc to the next point about the centre after c; other vN are vias at no path point)
+24V: C1.2 C3.1 D1.1 D2.2 D3.1 D4.2 D5.1 D6.2 D7.1 D8.2 D9.1 D10.2 D11.1 D12.2 D13.1 D14.2 D15.1 D16.2 D17.1 D18.2 D19.1 D20.2 D21.1 D22.2 D23.1 D24.2 D31.1 D32.2 D33.1 D34.2 D35.1 D36.2 K1.5 K2.5 K3.5 K4.5 K5.5 K6.5 K7.5 K8.5 K9.5 K10.5 K11.5 K12.5 K13.5 K14.5 K15.5 L1.2 pad.44 pad.45 pad.50 pad.52 pad.53 R25.1 R26.1 R31.2 R32.2 R36.2 R37.2 R38.2 R39.2 R40.2 R41.2 R42.2 R43.2 R44.2 R45.2 R49.2 R52.2 R60.2 X4.1 X4.2 | length 682.5
  Top Layer w1: 32.9,15.15 32.95,15.1 ; 70.7,15.1 70.9,15.3 ; 206.1,20.8 206.264,20.964 R44.2
  Top Layer w1.5: R60.2 14.1,15.1 ; D35.1 11.6,84.1 10.1,82.6 10.1,16.3 11.3,15.1 14.1,15.1 ; 32.9,15.15 R52.2 ; R49.2 51.8,15.1 ; 70.9,15.3 R31.2 ; R32.2@89.9,18.164 89.9,15.7 89.3,15.1 ; R36.2 109.1,15.1 ; R37.2 128,15.2 127.9,15.1 ; R38.2 148,20.8 ; R39.2 167,20.6 167.2,20.8 ; R45.2@186.5,18.864 186.5,20.8 ; v1(198,41.3) v1(198,47.9) ; v1(203.542,17.8) 203.542,10.358 208.5,5.4 R42.2 ; R25.1 228,27 227.1,26.1 227.1,20.9 ; pad.44@232,6.116 231.075,7.041 227.1,7.041 ; R43.2 277.172,34.664 ; R41.2 277.064,34.557 277.172,34.664 ; v1(307.1,31.9) 303,31.9 v1(300.2,34.7) 300.164,34.664 R40.2 277.172,34.664 ; 14.1,15.1 32.95,15.1 51.8,15.1 ; 51.8,15.1 70.7,15.1 89.3,15.1 ; 89.3,15.1 109.1,15.1 ; 109.1,15.1 127.9,15.1 ; 127.9,15.1 131.1,15.1 132,16 132,19.4 133.4,20.8 148,20.8 ; 148,20.8 167.2,20.8 ; 167.2,20.8 186.5,20.8 ; 186.5,20.8 206.1,20.8 227,20.8 227.1,20.9 ; 227,6.916 224.425,6.916 C3.1 227,7.041 ; 227,6.916 227.1,7.016 227.1,7.041 ; 227,6.916 227,7.041 ; 227,7.041 227.1,7.041 ; 227.1,7.041 227.1,20.9
  Bottom Layer w1: K15.5 18.5,85.66 D35.1 ; K14.5 37.6,85.86 D33.1 ; D32.2 D32.2@54.158,82.128 ; K13.5@56.5,90.719 56.5,85.66 D31.1 D31.1@57.789,84.229 ; K1.5@75.6,90.786 75.6,85.75 D1.1@77.05,84.3 ; K2.5 94.665,86.125 96.49,84.3 D3.1@96.65,84.14 ; K3.5 113.73,86.43 D5.1 ; K4.5 132.795,85.365 D7.1 ; K5.5 151.86,86.14 D9.1 ; K7.5 189.959,85.601 191.26,84.3 D13.1@191.71,83.85
  Bottom Layer w1.5: D36.2 16.5,83.3 17.3,84.1 D35.1 ; D34.2 35.7,83.614 36.286,84.2 D33.1 ; D32.2@54.158,82.128 54.158,83.158 55.229,84.229 D31.1@57.789,84.229 ; D2.2@73.889,82.459 75.73,84.3 77.05,84.3 D1.1 ; D4.2 94.63,84.3 96.49,84.3 D3.1 ; D6.2 113.43,84.3 D5.1 ; D8.2 132.23,84.3 D7.1 ; D10.2 151.63,84.3 D9.1 ; D12.2 170.23,84.3 D11.1 170.925,86.035 K6.5 ; D14.2 189.63,84.3 191.26,84.3 D13.1 ; K7.5 189.673,90.5 187,90.5 185.2,88.7 185.2,68.5 198,55.7 v1(198,47.9) ; v1(198,41.3) 201.6,41.3 203.542,39.358 v1(203.542,17.8) ; D16.2 208.33,84.3 D15.1 208.745,86.015 K8.5 ; D18.2 227.93,84.3 D17.1 227.658,85.802 K9.5 ; D20.2 246.73,84.3 D19.1 246.444,85.816 K10.5 ; D22.2 265.33,84.3 D21.1 265.357,85.103 K11.5 ; D24.2 285.56,84.23 D23.1 284.27,85.69 K12.5
GND: C1.1 C2.2 C3.2 C4.1 D25.2 D27.1 D28.2 D29.1 OP1.3 OP2.3 OP3.3 OP4.3 OP5.3 OP6.3 OP7.3 OP8.3 OP9.3 OP10.3 OP11.3 OP12.3 OP13.3 OP14.3 OP15.3 pad.39@257.7,16.416 pad.40 pad.41 pad.42 pad.43 pad.46 pad.47 pad.48 pad.55 Q1.2 Q2.2 Q3.2 Q4.2 Q5.2 Q6.2 Q7.2 Q8.2 Q9.2 Q10.2 Q11.2 Q12.2 Q13.2 Q14.2 Q15.2 R27.2 U1.3 U1.5 U1.6 X4.3 | length 462.3
  Top Layer w1: 271.4,71.605 271.4,76.694 271.986,77.28 Q11.2
  Top Layer w1.5: 21.9,71.399 21.9,76.017 22.779,76.895 24.758,76.895 24.873,77.01 Q15.2 ; OP15.3 22.27,51.37 23.2,52.3 40,52.3 41.003,51.297 41.003,49.777 OP14.3 51.6,49.71 ; 40.703,71.605 40.703,76.403 41.6,77.3 43.89,77.3 Q14.2 ; 53.1,57.75 54.35,56.5 54.35,48.179 55.229,47.3 59.091,47.3 59.97,48.179 OP13.3 ; 59.6,71.7 59.6,76.514 60.186,77.1 62.3,77.1 Q13.2 ; 79,72.2 79,76.814 79.586,77.4 Q1.2 ; OP1.3 91.59,49.91 94.3,47.2 98.3,47.2 98.37,47.27 OP2.3 109.89,49.91 112.6,47.2 117.2,47.2 117.37,47.37 OP3.3 129.49,49.91 132.2,47.2 136.8,47.2 136.77,47.23 OP4.3 149.19,49.91 151.9,47.2 156.1,47.2 156.17,47.27 OP5.3 168.19,49.91 170.9,47.2 174.591,47.2 175.47,48.079 OP6.3 187.59,49.91 190.3,47.2 194.1,47.2 194.74,47.84 OP7.3@194.74,49.91 ; 81.8,71 81.84,71.04 ; Q2.2 101.021,77.251 98.371,77.251 98.3,77.18 98.3,71.35 98.85,70.8 101.2,70.8 ; 117.2,71.5 117.3,71.6 117.3,76.7 117.89,77.29 Q3.2 ; 120.33,71.37 120.4,71.3 ; 136.7,71.6 136.7,76.764 137.286,77.35 Q4.2 ; 155.9,71.3 155.9,76.351 156.779,77.23 Q5.2 ; 175.2,71.929 175.2,76.541 176.079,77.42 Q6.2 ; 194.5,71.4 194.4,71.5 194.4,76.854 194.986,77.44 Q7.2 ; OP7.3 206.59,50.11 209.5,47.2 213.2,47.2 213.9,47.9 ; 196.98,71.02 197,71 ; 213.7,71 213.8,71.1 213.8,76.929 214.386,77.515 216.095,77.515 Q8.2 ; 213.87,47.93 OP8.3 225.99,50.11 228.9,47.2 233.27,47.2 OP9.3 245.69,50.11 248.6,47.2 251.8,47.2 252.7,48.1 252.57,48.23 OP10.3 264.59,50.11 267.5,47.2 271.8,47.2 271.8,49.34 OP11.3 284.09,49.41 286.3,47.2 290.24,47.2 290.97,47.93 OP12.3 ; 216,70.9 216.21,71.11 ; 232.9,71.7 232.8,71.8 232.8,76.619 233.386,77.205 235.465,77.205 Q9.2 ; 252,71.023 252,76.291 252.879,77.17 Q10.2 ; 254.6,70.7 254.63,70.73 ; 273.94,71.16 274,71.1 ; 290.4,71.6 290.5,71.7 290.5,76.664 291.086,77.25 Q12.2 ; 292.63,70.97 292.7,70.9
  Bottom Layer w1.5: D27.1@214.7,22.53 215.314,21.916 R27.2 229.5,18 ; 286.455,24.8 288.9,24.8 ; 291.1,10.7 291.1,22.6
GND2: J1.16 J1.17 J1.18 J1.19 J1.20 OP1.2 OP2.2 OP3.2 OP4.2 OP5.2 OP6.2 OP7.2 OP8.2 OP9.2 OP10.2 OP11.2 OP12.2 OP13.2 OP14.2 OP15.2 | length 306.8
  Bottom Layer w1: 41.07,44.47 41.1,44.5 ; 59.97,44.47 60,44.5
  Bottom Layer w1.5: OP15.2 22.27,43.621 23.149,44.5 41.1,44.5 60,44.5 79.5,44.5 ; OP14.2 41.07,44.47 ; OP13.2 59.97,44.47 ; OP1.2 79.17,44.03 79.1,44.1 79.5,44.5 ; OP2.2 98.37,44.37 98.5,44.5 ; OP3.2 117.37,44.23 117.1,44.5 ; 139.9,39.16 OP4.2 136.77,44.37 136.9,44.5 ; OP5.2 156.17,44.33 156,44.5 ; OP6.2 175.47,44.47 ; OP7.2 194.74,44.06 194.33,44.47 ; OP8.2 213.87,43.73 213.13,44.47 ; OP9.2 233.3,42.52 233.3,44.47 ; OP10.2 252.6,42.52 252.6,44.1 252.23,44.47 ; OP11.2 271.9,41.82 271.9,44.47 ; OP12.2 291,42.52 291,44.2 290.73,44.47 271.9,44.47 ; 79.5,44.5 98.5,44.5 ; 98.5,44.5 117.1,44.5 ; 117.1,44.5 136.9,44.5 ; 136.9,44.5 156,44.5 ; 156,44.5 175.5,44.5 175.47,44.47 ; 175.47,44.47 194.33,44.47 ; 194.33,44.47 213.13,44.47 ; 213.13,44.47 233.3,44.47 ; 233.3,44.47 252.23,44.47 ; 252.23,44.47 271.9,44.47
IN_1: J1.15 R28.1 | length 89.3
  Top Layer w1: v1(76.6,11.8) 76.6,4.4 77.3,3.7 149.914,3.7 150.5,4.286 J1.15
  Bottom Layer w1: v1(76.6,11.8) R28.1
IN_2: J1.14 R2.1 | length 68.9
  Top Layer w1: v1(95.8,11.9) 95.8,8.6 96.8,7.6 152.414,7.6 153,7.014 J1.14
  Bottom Layer w1: v1(95.8,11.9) R2.1
IN_3: J1.13 R30.1 | length 52.6
  Top Layer w1: v1(114.8,11.9) 114.8,10.286 115.386,9.7 154.838,9.7 155.423,9.114 155.423,5.477 J1.13
  Bottom Layer w1: v1(114.8,11.9) R30.1
IN_4: J1.12 R33.1 | length 35
  Top Layer w1: R33.1 134.2,12.4 135.3,11.3 156.2,11.3 158,9.5 J1.12
IN_5: J1.11 R34.1 | length 17.4
  Top Layer w1: R34.1 153.7,13.6 154.6,12.7 156.573,12.7 160.5,8.773 J1.11
IN_6: J1.10 R35.1 | length 17.6
  Top Layer w1: J1.10 163,8.964 R35.1
IN_7: J1.9 R46.1 | length 35.7
  Top Layer w1: J1.9 165.5,8.5 173,16 192.414,16 193,16.586 R46.1
IN_8: J1.8 R51.1 | length 39.4
  Top Layer w1: J1.8 168,8.3 173.9,14.2 195.436,14.2 R51.1
IN_9: J1.7 R15.1 | length 67.6
  Bottom Layer w1: J1.7 170.5,11 175.1,15.6 204.3,15.6 205.046,16.346 205.046,27.746 208.6,31.3 208.6,37.5 207.943,38.157 206.307,38.157 R15.1
IN_10: J1.6 R16.1 | length 81.5
  Bottom Layer w1: J1.6 173,10.8 176.5,14.3 205.1,14.3 206.3,15.5 206.3,27.2 215.1,36 229.414,36 230,36.586 230,37.7 R16.1
IN_11: J1.5 R17.1 | length 98.1
  Bottom Layer w1: J1.5 175.5,10.414 177.886,12.8 205.4,12.8 207.6,15 207.6,26.7 215.6,34.7 249.014,34.7 249.6,34.114 R17.1
IN_12: J1.4 R18.1 | length 110.1
  Bottom Layer w1: J1.4 178,9.8 179.6,11.4 206.2,11.4 212.5,17.7 212.5,27.2 215.1,29.8 262.2,29.8 263.464,28.536 R18.1
IN_13: J1.3 R53.1 | length 136.9
  Bottom Layer w1: R53.1 57.4,4.9 58.546,3.754 136.28,3.754 136.288,3.746 178.846,3.746 J1.3
IN_14: J1.2 R54.1 | length 161.1
  Bottom Layer w1: R54.1 38.5,3.8 39.8,2.5 135.76,2.5 135.768,2.492 182.406,2.492 183,3.086 J1.2
IN_15: J1.1 R61.1 | length 184.2
  Bottom Layer w1: R61.1 19.6,3 21.508,1.092 183.692,1.092 185.5,2.9 J1.1
L: J2.1 J2.2 K1.1 K2.1 K3.1 K4.1 K5.1 K6.1 K7.1 K8.1 K9.1 K10.1 K11.1 K12.1 K13.1 K14.1 K15.1
NetC2_1: C2.1 C4.2 D26.2 D30.1 U1.1
NetD1_2: D1.2 K1.2 Q1.1 R7.2 | length 20.5
  Bottom Layer w1: D1.2 86.195,84.405 86.705,84.405 87.6,85.3 K1.2@87.6,90.786
  Bottom Layer w1.5: Q1.1@81.89,75.16 85.429,75.16 86.307,76.039 R7.2 86.307,84.069 86.09,84.286 D1.2
NetD2_1: D2.1 R7.1 | length 27.3
  Bottom Layer w1.5: D2.1@74.1,79.895 74.1,69.897 74.797,69.2 R7.1
NetD3_2: D3.2 K2.2 Q2.1 R8.2 | length 19.4
  Bottom Layer w1: D3.2 106.665,85.435 K2.2
  Bottom Layer w1.5: Q2.1@100.99,75 103.136,75 R8.2 105.53,77.458 D3.2
NetD4_1: D4.1 R8.1 | length 27.6
  Bottom Layer w1.5: D4.1 93,70.252 R8.1
NetD5_2: D5.2 K3.2 Q3.1 R9.2 | length 19.3
  Bottom Layer w1: D5.2 125.73,85.29 K3.2
  Bottom Layer w1.5: Q3.1 122.391,75 R9.2 124.74,77.503 D5.2
NetD6_1: D6.1 R9.1 | length 27.8
  Bottom Layer w1.5: D6.1 111.8,70.707 R9.1
NetD7_2: D7.2 K4.2 Q4.1 R29.2 | length 20.2
  Bottom Layer w1: D7.2 144.795,86.355 K4.2
  Bottom Layer w1.5: Q4.1@139.61,75.1 141.746,75.1 R29.2 144.072,82.968 D7.2
NetD8_1: D8.1 R29.1 | length 28
  Bottom Layer w1.5: D8.1 130.6,71.162 R29.1
NetD9_2: D9.2 K5.2 Q5.1 R11.2 | length 20.1
  Bottom Layer w1: D9.2 163.86,85.58 K5.2
  Bottom Layer w1.5: Q5.1@158.39,74.99 159.029,74.99 159.039,75 160.901,75 R11.2 163.327,83.553 D9.2
NetD10_1: D10.1 R11.1 | length 28
  Bottom Layer w1.5: D10.1 150,71.017 R11.1
NetD11_2: D11.2 K6.2 Q6.1 R12.2 | length 20.4
  Bottom Layer w1.5: Q6.1@177.985,75.18 178.529,75.18 178.549,75.2 180.355,75.2 182.925,77.77 182.925,84.278 ; D11.2 182.903,84.3 182.925,84.278 ; K6.2 182.925,84.278
NetD12_1: D12.1 R12.1 | length 28.2
  Bottom Layer w1.5: D12.1 168.6,71.671 R12.1
NetD13_2: D13.2 K7.2 Q7.1 R19.2 | length 22.6
  Bottom Layer w1: D13.2@200.59,83.85 201.959,85.219 ; 201.836,82.604 201.959,82.727 201.959,85.219 ; K7.2 201.959,85.219
  Bottom Layer w1.5: Q7.1@197.302,75.2 199.61,75.2 R19.2 201.836,82.604 D13.2@200.59,83.85
NetD14_1: D14.1 R19.1 | length 28.2
  Bottom Layer w1.5: D14.1 188,71.526 R19.1
NetD15_2: D15.2 K8.2 Q8.1 R20.2 | length 21
  Bottom Layer w1.5: Q8.1@216.26,75.3 218.965,75.3 R20.2 221.091,84.3 ; D15.2 221.091,84.3 ; K8.2 221.091,90.44 221.091,84.3
NetD16_1: D16.1 R20.1 | length 28.4
  Bottom Layer w1.5: D16.1 206.7,72.081 R20.1
NetD17_2: D17.2 K9.2 Q9.1 R21.2 | length 21.8
  Bottom Layer w1.5: Q9.1@235.63,75 237.92,75 R21.2 240.346,84.1 ; D17.2 240.146,84.3 240.346,84.1 ; K9.2 240.346,90.098 240.346,84.1
NetD18_1: D18.1 R21.1 | length 28.3
  Bottom Layer w1.5: D18.1 226.3,71.736 R21.1
NetD19_2: D19.2 K10.2 Q10.1 R22.2 | length 22.7
  Bottom Layer w1.5: Q10.1@254.58,74.9 257.075,74.9 R22.2 259.6,84.2 ; D19.2 259.5,84.3 259.6,84.2 ; K10.2 259.6,89.63 259.6,84.2
NetD20_1: D20.1 R22.1 | length 28.4
  Bottom Layer w1.5: D20.1 245.1,72.19 R22.1
NetD21_2: D21.2 K11.2 Q11.1 R23.2 | length 23.9
  Bottom Layer w1.5: Q11.1@273.89,75 276.429,75 R23.2 278.855,84 ; D21.2 278.555,84.3 278.855,84 ; K11.2 278.855,89.288 278.855,84
NetD22_1: D22.1 R23.1 | length 28.7
  Bottom Layer w1.5: D22.1 263.7,72.845 R23.1
NetD23_2: D23.2 K12.2 Q12.1 R24.2 | length 24.4
  Bottom Layer w1.5: Q12.1 295.644,74.96 R24.2 298.11,84.6 ; D23.2 297.91,84.4 298.11,84.6 ; K12.2 298.11,88.946 298.11,84.6
NetD24_1: D24.1 R24.1 | length 28.3
  Bottom Layer w1.5: D24.1 284,71.8 R24.1
NetD27_2: D27.2 R26.2 | length 5
  Top Layer w1.5: D27.2@214.67,25.1 214.7,25.07 219.166,25.07 R26.2
NetD28_1: D28.1 L1.1 U1.2
NetD31_2: D31.2 K13.2 Q13.1 R58.2 | length 22.4
  Bottom Layer w1: D31.2 66.845,84.405 67.505,84.405 68.5,85.4 K13.2 ; R58.2@67.626,76.7 R58.2 R58.2@67.651,76.651
  Bottom Layer w1.5: Q13.1 67.066,74.91 67.651,75.496 R58.2@67.651,76.651 ; D31.2 66.74,77.586 R58.2@67.626,76.7
NetD32_1: D32.1 R58.1 | length 28.2
  Bottom Layer w1.5: D32.1 54.1,70.564 R58.1
NetD33_2: D33.2 K14.2 Q14.1 R59.2 | length 22.1
  Bottom Layer w1: D33.2 49.5,85.56 49.5,85.6 49.6,85.7 K14.2
  Bottom Layer w1.5: Q14.1 48.482,75.02 49.481,76.018 49.481,76.781 R59.2 49.5,76.9 48.1,78.3 48.1,84.16 D33.2
NetD34_1: D34.1 R59.1 | length 27.4
  Bottom Layer w1.5: D34.1 35.7,70.864 R59.1
NetD35_2: D35.2 K15.2 Q15.1 R63.2 | length 21.6
  Bottom Layer w1: D35.2 29.089,84.1 30.5,85.511 K15.2
  Bottom Layer w1.5: Q15.1 28.02,74.72 R63.2 30.1,76.9 28.8,78.2 28.8,81.006 28.94,81.146 D35.2
NetD36_1: D36.1 R63.1 | length 27.7
  Bottom Layer w1.5: D36.1 16.5,70.664 R63.1
NetOP1_1: OP1.1 R28.2 | length 4.4
  Bottom Layer w1.5: OP1.1 76.63,37.97 R28.2@76.7,37.9
NetOP1_4: OP1.4 R1.2 R31.1 | length 24.9
  Top Layer w1.5: R31.1@70.9,37.8 70.9,49.91 OP1.4
  Bottom Layer w1.5: OP1.4 76.68,49.96 R1.2
NetOP2_1: OP2.1 R2.2 | length 4.4
  Bottom Layer w1.5: R2.2@95.8,37.9 95.8,42.26 OP2.1
NetOP2_4: OP2.4 R3.2 R32.1 | length 23.3
  Top Layer w1.5: R32.1@89.9,37.9 v1(89.9,47)
  Bottom Layer w1.5: v1(89.9,47) 92.81,49.91 OP2.4 95.83,56.874 R3.2@95.935,56.979
NetOP3_1: OP3.1 R30.2 | length 4.4
  Bottom Layer w1.5: OP3.1 114.9,42.22 R30.2@114.9,37.9
NetOP3_4: OP3.4 R10.2 R36.1 | length 23.1
  Top Layer w1.5: R36.1 v1(109.1,46.6)
  Bottom Layer w1.5: v1(109.1,46.6) 112.41,49.91 OP3.4 114.83,56.619 R10.2@115.19,56.979
NetOP4_1: OP4.1 R33.2 | length 4.4
  Bottom Layer w1.5: R33.2@134.2,37.9 134.2,42.26 OP4.1
NetOP4_4: OP4.4 R4.2 R37.1 | length 23.5
  Top Layer w1.5: R37.1 v1(128,46.9)
  Bottom Layer w1.5: v1(128,46.9) 131.01,49.91 OP4.4 134.444,50.124 R4.2@134.444,56.979
NetOP5_1: OP5.1 R34.2 | length 3.7
  Bottom Layer w1.5: OP5.1 153.63,38.681 R34.2
NetOP5_4: OP5.4 R5.2 R38.1 | length 22.3
  Top Layer w1.5: v1(147.9,46.8) 148,46.7 R38.1
  Bottom Layer w1.5: v1(147.9,46.8) 151.01,49.91 OP5.4 153.63,56.91 R5.2
NetOP6_1: OP6.1 R35.2 | length 3.7
  Top Layer w1.5: OP6.1@172.9,42.26 OP6.1
  Bottom Layer w1.5: R35.2 OP6.1@172.9,42.26
NetOP6_4: OP6.4 R6.2 R39.1 | length 22.3
  Top Layer w1.5: R39.1 v1(167,46.6)
  Bottom Layer w1.5: v1(167,46.6) 170.31,49.91 OP6.4 172.93,56.955 R6.2
NetOP7_1: OP7.1 R46.2 | length 4.7
  Top Layer w1: OP7.1 192.2,39.062 193,38.262 R46.2
NetOP7_4: OP7.4 R13.2 R45.1 | length 22.2
  Top Layer w1.5: R45.1@186.5,38.6 v1(186.5,46.5)
  Bottom Layer w1.5: v1(186.5,46.5) 190.11,50.11 OP7.4 ; OP7.4@192.2,49.91 OP7.4 ; R13.2 192.2,56.97 OP7.4
NetOP8_1: OP8.1 R51.2 | length 13.5
  Top Layer w1.5: R51.2 200.119,38.619 200.119,39.69 201.029,40.6 209.44,40.6 OP8.1
NetOP8_4: OP8.4 R14.2 R42.1 | length 44.8
  Top Layer w1.5: R42.1 210.6,35.2 217.3,41.9 v1(217.3,46.7)
  Bottom Layer w1.5: OP8.4 211.33,54.6 ; R14.2@211.6,57.69 211.33,57.42 211.33,54.6 ; v1(217.3,46.7) 217.3,52.7 215.4,54.6 211.33,54.6
NetOP9_1: OP9.1 R15.2 | length 8.2
  Bottom Layer w1: R15.2@226.1,38.1 226.1,41.1 227.49,42.49 OP9.1
NetOP9_4: OP9.4 R44.1 R48.2 | length 32
  Top Layer w1: v1(223.2,46.9) 223.2,35.3 R44.1
  Bottom Layer w1: v1(223.2,46.9) 226.41,50.11 OP9.4
  Bottom Layer w1.5: OP9.4 230.73,57.63 R48.2@230.8,57.7
NetOP10_1: OP10.1 R16.2 | length 4.9
  Top Layer w1.5: R16.2@250,37.6 250,42.46 OP10.1
NetOP10_4: OP10.4 R43.1 R47.2 | length 34.5
  Top Layer w1.5: R43.1 256.6,40.1 v1(256.6,47)
  Bottom Layer w1: R47.2 250.03,57.77 OP10.4
  Bottom Layer w1.5: R47.2 250,50.14 OP10.4 250.03,48.27 251.3,47 v1(256.6,47)
NetOP11_1: OP11.1 R17.2 | length 9.3
  Top Layer w1.5: OP11.1 269.4,41.72 R17.2@269.4,32.5
NetOP11_4: OP11.4 R40.1 R55.2 | length 21.1
  Top Layer w1: 269.3,54.7 269.6,54.4 R40.1
  Top Layer w1.5: R55.2@269.3,56.979 269.3,54.7 269.3,49.44 OP11.4
NetOP12_1: OP12.1 R18.2 | length 45.6
  Top Layer w1.5: OP12.1 OP12.1@288.5,42.42
  Bottom Layer w1.5: R18.2 283.181,22.719 272.481,22.719 271.5,23.7 271.5,38.5 273.3,40.3 286.24,40.3 OP12.1
NetOP12_4: OP12.4 R41.1 R50.2 | length 39.3
  Bottom Layer w1.5: R50.2 288.4,53.8 ; OP12.4 288.4,50.14 288.4,53.8 ; R41.1 297.9,32.9 297.9,53.7 297.8,53.8 288.4,53.8
NetOP13_1: OP13.1 R53.2 | length 4.8
  Bottom Layer w1.5: R53.2 57.415,37.315 57.415,42.075 OP13.1
NetOP13_4: OP13.4 R49.1 R56.2 | length 25
  Top Layer w1.5: R49.1 v1(51.8,47.2)
  Bottom Layer w1.5: v1(51.8,47.2) 51.852,47.252 51.852,48.852 52.71,49.71 OP13.4 57.465,49.745 57.465,57.129 R56.2
NetOP14_1: OP14.1 R54.2 | length 5.1
  Bottom Layer w1: R54.2 R54.2@38.515,37.015 ; OP14.1@38.515,42.075 OP14.1
  Bottom Layer w1.5: R54.2@38.515,37.015 OP14.1@38.515,42.075
NetOP14_4: OP14.4 R52.1 R57.2 | length 25
  Top Layer w1.5: R52.1 32.9,48.7 33.91,49.71 OP14.4
  Bottom Layer w1: OP14.4 OP14.4@38.565,49.745 ; R57.2@38.565,56.929 R57.2
  Bottom Layer w1.5: OP14.4@38.565,49.745 R57.2@38.565,56.929
NetOP15_1: OP15.1 R61.2 | length 5.1
  Bottom Layer w1: R61.2 R61.2@19.665,37.065 ; OP15.1@19.665,42.025 OP15.1
  Bottom Layer w1.5: R61.2@19.665,37.065 OP15.1@19.665,42.025
NetOP15_4: OP15.4 R60.1 R62.2 | length 25
  Top Layer w1.5: R60.1 14.1,48.7 15.11,49.71 OP15.4
  Bottom Layer w1: R62.2 R62.2@19.715,56.949 ; OP15.4@19.715,49.725 OP15.4
  Bottom Layer w1.5: OP15.4@19.715,49.725 R62.2@19.715,56.949
NetQ1_3: Q1.3 R1.1 | length 7.7
  Bottom Layer w1.5: R1.1 76.8,76.835 76.8,79 77.49,79.69 Q1.3
NetQ2_3: Q2.3 R3.1 | length 7.2
  Bottom Layer w1.5: R3.1@95.935,76.715 95.935,78.335 97.16,79.56 Q2.3
NetQ3_3: Q3.3 R10.1 | length 7.6
  Bottom Layer w1.5: R10.1@115.19,76.715 115.2,76.725 115.2,77.4 115.2,78.9 115.88,79.58 Q3.3
NetQ4_3: Q4.3 R4.1 | length 6.9
  Bottom Layer w1.5: R4.1 134.55,77.286 134.55,78.759 135.429,79.638 139.558,79.638 Q4.3
NetQ5_3: Q5.3 R5.1 | length 7.1
  Bottom Layer w1.5: R5.1 153.699,78.699 154.52,79.52 Q5.3
NetQ6_3: Q6.3 R6.1 | length 7.7
  Bottom Layer w1.5: R6.1 173,76.761 173,79.3 173.41,79.71 Q6.3
NetQ7_3: Q7.3 R13.1 | length 7.2
  Bottom Layer w1.5: R13.1 192.209,78.709 193.23,79.73 Q7.3
NetQ8_3: Q8.3 R14.1 | length 6.8
  Bottom Layer w1.5: R14.1@211.7,77.426 211.7,79.6 212.02,79.92 Q8.3
NetQ9_3: Q9.3 R48.1 | length 7.2
  Bottom Layer w1.5: R48.1@230.718,76.715 230.718,78.618 231.71,79.61 Q9.3
NetQ10_3: Q10.3 R47.1 | length 5.1
  Bottom Layer w1.5: R47.1@250.2,77.8 251.86,79.46 Q10.3
NetQ11_3: Q11.3 R55.1 | length 6.3
  Bottom Layer w1.5: R55.1 269.35,77.45 269.35,78.691 270.229,79.57 Q11.3
NetQ12_3: Q12.3 R50.1 | length 6.4
  Bottom Layer w1.5: R50.1@288.483,76.715 288.483,78.583 289.44,79.54 Q12.3
NetQ13_3: Q13.3 R56.1 | length 7.1
  Bottom Layer w1.5: R56.1 57.5,78.904 58.086,79.49 Q13.3
NetQ14_3: Q14.3 R57.1 | length 7.7
  Bottom Layer w1.5: R57.1 38.6,78.7 39.5,79.6 Q14.3
NetQ15_3: Q15.3 R62.1 | length 7.6
  Bottom Layer w1.5: R62.1 19.7,78.8 20.3,79.4 24.8,79.4 Q15.3
NetR25_2: pad.39@256,16.6 R25.2 R27.1 U1.4 | length 16.4
  Top Layer w1.5: R27.1 R25.2
  Bottom Layer w1: R27.1 249.236,20.464 249.7,20 255.1,20 256,19.1 pad.39@256,16.6
OUT_1: K1.4 X3.5
OUT_2: K2.4 X3.4
OUT_3: K3.4 X3.3
OUT_4: K4.4 X3.2
OUT_5: K5.4 X3.1
OUT_6: K6.4 X2.5
OUT_7: K7.4 X2.4
OUT_8: K8.4 X2.3
OUT_9: K9.4 X2.2
OUT_10: K10.4 X2.1
OUT_11: K11.4 X1.5
OUT_12: K12.4 X1.4
OUT_13: K13.4 X1.3
OUT_14: K14.4 X1.2
OUT_15: K15.4 X1.1
~24V: D25.1 D26.1 X4.4
~24V.: D29.2 D30.2 X4.5
pads on no net: K1.3 K2.3 K3.3 K4.3 K5.3 K6.3 K7.3 K8.3 K9.3 K10.3 K11.3 K12.3 K13.3 K14.3 K15.3

## Keep-outs
Keep-Out Layer:
  the board outline again, w0.254

## Other copper
Top Layer:
  rectangle net OUT_12: 281.6,100.8 287,121.4
  rectangle net OUT_12: 60,119.9 287,124.3
  rectangle net OUT_12: 55.4,113.8 60.7,124.3
  rectangle net OUT_9: 224.8,100.5 231.4,107.7
  rectangle net OUT_9: 213.5,106.2 231.4,112.4
  rectangle net OUT_9: 210.2,106.2 215.6,119.1
  rectangle net OUT_7: 186.9,107.2 202.6,112.6
  rectangle net OUT_7: 186.9,100.9 193.4,111.6
  rectangle net OUT_7: 200,107.2 205.1,119.2
  rectangle net OUT_14: 35.7,100.8 40.5,107.6
  rectangle net OUT_14: 35.7,106.6 48.6,111.2
  rectangle net OUT_14: 45.8,106.6 50.5,118.6
  rectangle net OUT_4: 130.4,100.6 135,108.4
  rectangle net OUT_4: 110.2,106.6 135,111
  rectangle net OUT_4: 107.5,106.6 112.1,118.9
  rectangle net OUT_2: 92.9,100.8 99,105.3
  rectangle net OUT_2: 97.1,100.8 101.6,119
  rectangle net +24V: 17.4,87.5 20.1,97.7
  rectangle net +24V: 35.9,87.5 38.6,97.7
  rectangle net +24V: 54.9,87.4 57.6,97.6
  rectangle net GND: 51.1,48.9 55.1,66.6
  rectangle net NetC2_1: 260.6,14.1 288.1,18.4
  rectangle net NetC2_1: 284.9,10.3 288.1,19.7
  rectangle net +24V: 225.2,25.4 240.3,30.9
  rectangle net +24V: 225.3,5.3 228.3,27.1
  rectangle net +24V: 223.5,5.2 233.1,9.8
  rectangle net +24V: 275.9,28.3 280,37.6
  rectangle net +24V: 230,28.3 277.6,30.9
  rectangle net +24V: 300.3,30.3 308,33
  rectangle net +24V: 298.8,30.3 303.8,37.6
  rectangle net +24V: 276.4,33.3 299.6,37.6
  rectangle net ~24V.: 308.6,9.8 314.5,55.6
  rectangle net +24V: 316.3,17 320.8,99.7
  rectangle net GND: 165.9,49.3 169.9,66.8
  rectangle net GND: 126.5,49.5 130.5,67
  rectangle net GND: 88.7,49.5 92.7,67
  rectangle net GND: 290,48 294.9,70.4
  rectangle net ~24V.: 307.9,49.4 314.5,77.6
  rectangle net ~24V.: 304.8,33.8 311.2,59.8
  rectangle net ~24V.: 297.4,2.9 309.2,12.9
  rectangle net GND: 252.8,14.416 254.8,19.716
  region net NetD28_1: 251,18.316 247.2,18.316 247.2,12.016 251,12.016
  region net NetD28_1: 259.9,16.216 258.9,16.216 258.9,12.016 259.9,12.016
  rectangle net GND: 252.3,4.1 263.1,10.016
  region net NetD28_1: 259.9,14.116 250.2,14.116 250.2,10.616 259.9,10.616
  region net NetD28_1: 259.7,23.516 259,23.516 259,15.916 259.7,15.916
  region net GND: 258.2,20.416 257.2,20.416 257.2,17.016 258.2,17.016
  region net GND: 257.5,24.9 252.8,24.9 252.8,19.016 257.5,19.016
  rectangle net +24V: 307.9,89.7 314.5,97.2
  rectangle net GND: 300.2,68.8 305,87.8
  rectangle net GND: 300.3,84.1 314.4,87.9
  rectangle net GND: 21.1,64.9 305,72.1
  rectangle net +24V: 73.9,87.5 76.6,97.7
  rectangle net +24V: 92.9,87.4 95.6,97.6
  rectangle net +24V: 112,87.3 114.7,97.5
  rectangle net +24V: 131.1,87.3 133.8,97.5
  rectangle net +24V: 150,87.3 152.7,97.5
  rectangle net +24V: 169.2,87.4 171.9,97.6
  rectangle net +24V: 188.3,87.4 191,97.6
  rectangle net +24V: 206.8,87.6 209.5,97.8
  rectangle net +24V: 225.8,87.4 228.5,97.6
  rectangle net +24V: 244.6,87.3 247.3,97.5
  rectangle net +24V: 263.6,87.4 266.3,97.6
  rectangle net +24V: 282.6,87.4 285.3,97.6
  rectangle net +24V: 17.4,94.4 320.8,99.7
  region net NetD28_1: 259.5,15.591 259.5,21.016 260.2,21.716 259.4,21.716 259.4,20.916 260.2,21.716
  region net NetD28_1: 259.2,16.216 259.2,21.316 258.6,21.916 258.7,22.016 258.6,21.916
Bottom Layer:
  rectangle net OUT_11: 263,100.8 268.5,121.8
  rectangle net OUT_11: 63.2,120 268.5,124.3
  rectangle net OUT_11: 60.7,113.7 65.3,124.3
  rectangle net OUT_10: 243.6,100.6 249.9,115.6
  rectangle net OUT_10: 215.4,113.6 249.9,119.1
  rectangle net OUT_8: 207.9,100.6 210.6,106.6
  rectangle net OUT_8: 204.9,100.6 210.2,119.2
  rectangle net OUT_6: 171.5,113.9 200.2,119.2
  rectangle net OUT_6: 168.5,101.3 173.7,119.2
  rectangle net OUT_5: 149.3,101.4 155.1,116.8
  rectangle net OUT_5: 112.5,114.5 155.1,119
  rectangle net OUT_3: 102.2,107.3 115.8,112.2
  rectangle net OUT_3: 111.5,100.9 115.8,109.1
  rectangle net OUT_3: 102.2,108.2 106.4,119
  rectangle net OUT_1: 73.6,101.1 79,116.4
  rectangle net OUT_1: 73.6,114.8 96.6,119.1
  rectangle net OUT_13: 53.5,101.1 58.6,107
  rectangle net OUT_13: 51.4,101.1 55,118.7
  rectangle net OUT_15: 19.5,108.5 44.8,111.8
  rectangle net OUT_15: 40.6,110.6 44.8,118.7
  rectangle net OUT_15: 16.3,101.7 21,111.8
  rectangle net ~24V: 297.4,15.5 301.8,28.8
  rectangle net GND2: 136.6,4.5 148.8,8.8
  rectangle net L: 13.8,113.1 31.7,120.1
  rectangle net L: 10.2,98.2 15.1,120.1
  rectangle net L: 20.9,87.7 28.6,95.6
  rectangle net L: 39.8,87.4 47.5,95.3
  rectangle net L: 58.7,87.5 66.4,95.4
  rectangle net L: 77.8,87.3 85.5,95.2
  rectangle net L: 96.8,87.4 104.5,95.3
  rectangle net L: 115.8,87.4 123.5,95.3
  rectangle net L: 134.9,87.3 142.6,95.2
  rectangle net L: 154.1,87.3 161.8,95.2
  rectangle net L: 173.2,87.4 180.9,95.3
  rectangle net L: 192.1,87.4 199.8,95.3
  rectangle net L: 210.9,87.4 218.6,95.3
  rectangle net L: 229.9,87.4 237.6,95.3
  rectangle net L: 248.6,87.4 256.3,95.3
  rectangle net L: 267.7,87.5 275.4,95.4
  rectangle net L: 10.2,93.5 291.7,99.5
  rectangle net L: 288.2,87.3 292.3,99.5
  rectangle net GND2: 136.6,4.5 140.9,44
  rectangle net +24V: 306.7,29.9 315.4,34
  rectangle net +24V: 302.3,1.2 308.5,13.1
  rectangle net +24V: 304.5,11.3 314.1,22.5
  region net +24V: 320.8,17 320.8,43.7 312.6,43.7 312.6,17
  rectangle net GND: 222.7,14.2 254.8,18.416
  rectangle net GND: 284.9,4 293.5,9.7
  rectangle net GND: 292.7,36.5 295.5,51.3
  rectangle net GND: 257.3,2.3 293.4,9.8
  rectangle net ~24V: 304.5,78.5 314.4,83.1
  rectangle net ~24V: 301.6,24.5 306,83.1
  region net GND: 295.5,51.5 290,51.5 290,48.4 295.5,48.4
  rectangle net +24V: 208.3,3.8 247.7,8.5
  rectangle net GND: 257.1,14.216 258.4,18.116
  rectangle net GND: 290.5,6.116 293.6,41
  rectangle net GND: 285.3,20.9 293.5,25.7
  rectangle net GND: 252.3,2.016 263,10.016
  rectangle net GND: 253,2.016 260.9,14.916
  rectangle net GND: 252.3,8.916 254.8,18.416

## Silkscreen, mask and mechanical layers (free items; w line width, h text height)
Top Overlay:
  circle w0.254: c318.07,5.2 r3.384
  circle w0.254: c6.1,4.9 r3.384
  circle w0.254: c6.1,120.34 r3.384
  circle w0.254: c318.14,120.64 r3.384
  text "K1-K2-K3-K4-K5" at 114.646,122.846 h1.52 r180
  text "K11-K12-K13-K14-K15" at 66.246,122.746 h1.52 r180
  text "K6-K7-K8-K9-K10" at 217.946,122.246 h1.52 r180
  text "+24V" at 317.546,90.454 h1.52 r90
  text "GND" at 317.646,83.854 h1.52 r90
  text "~24V" at 315.1,80 h1.52
  text "~24V" at 315.1,74.6 h1.52
Bottom Overlay:
  drawing of 5 lines, arcs and shapes, not listed
  text "ILKA Controll System on Relay" at 320.838,75.446 h1.52 r90
  text "DC/DC LM2596ADJ" at 318.146,75.246 h1.52 r90